# Altium PCB Solears_v1.PcbDoc
Units mm, origin at the board's own origin, x right, y up, seen from the top; angles counter-clockwise.
Board outline 58.04 x 66.42 mm, 2 copper layers (Top Layer, Bottom Layer); 119 components, 96 nets, 392 pads, 59 vias.
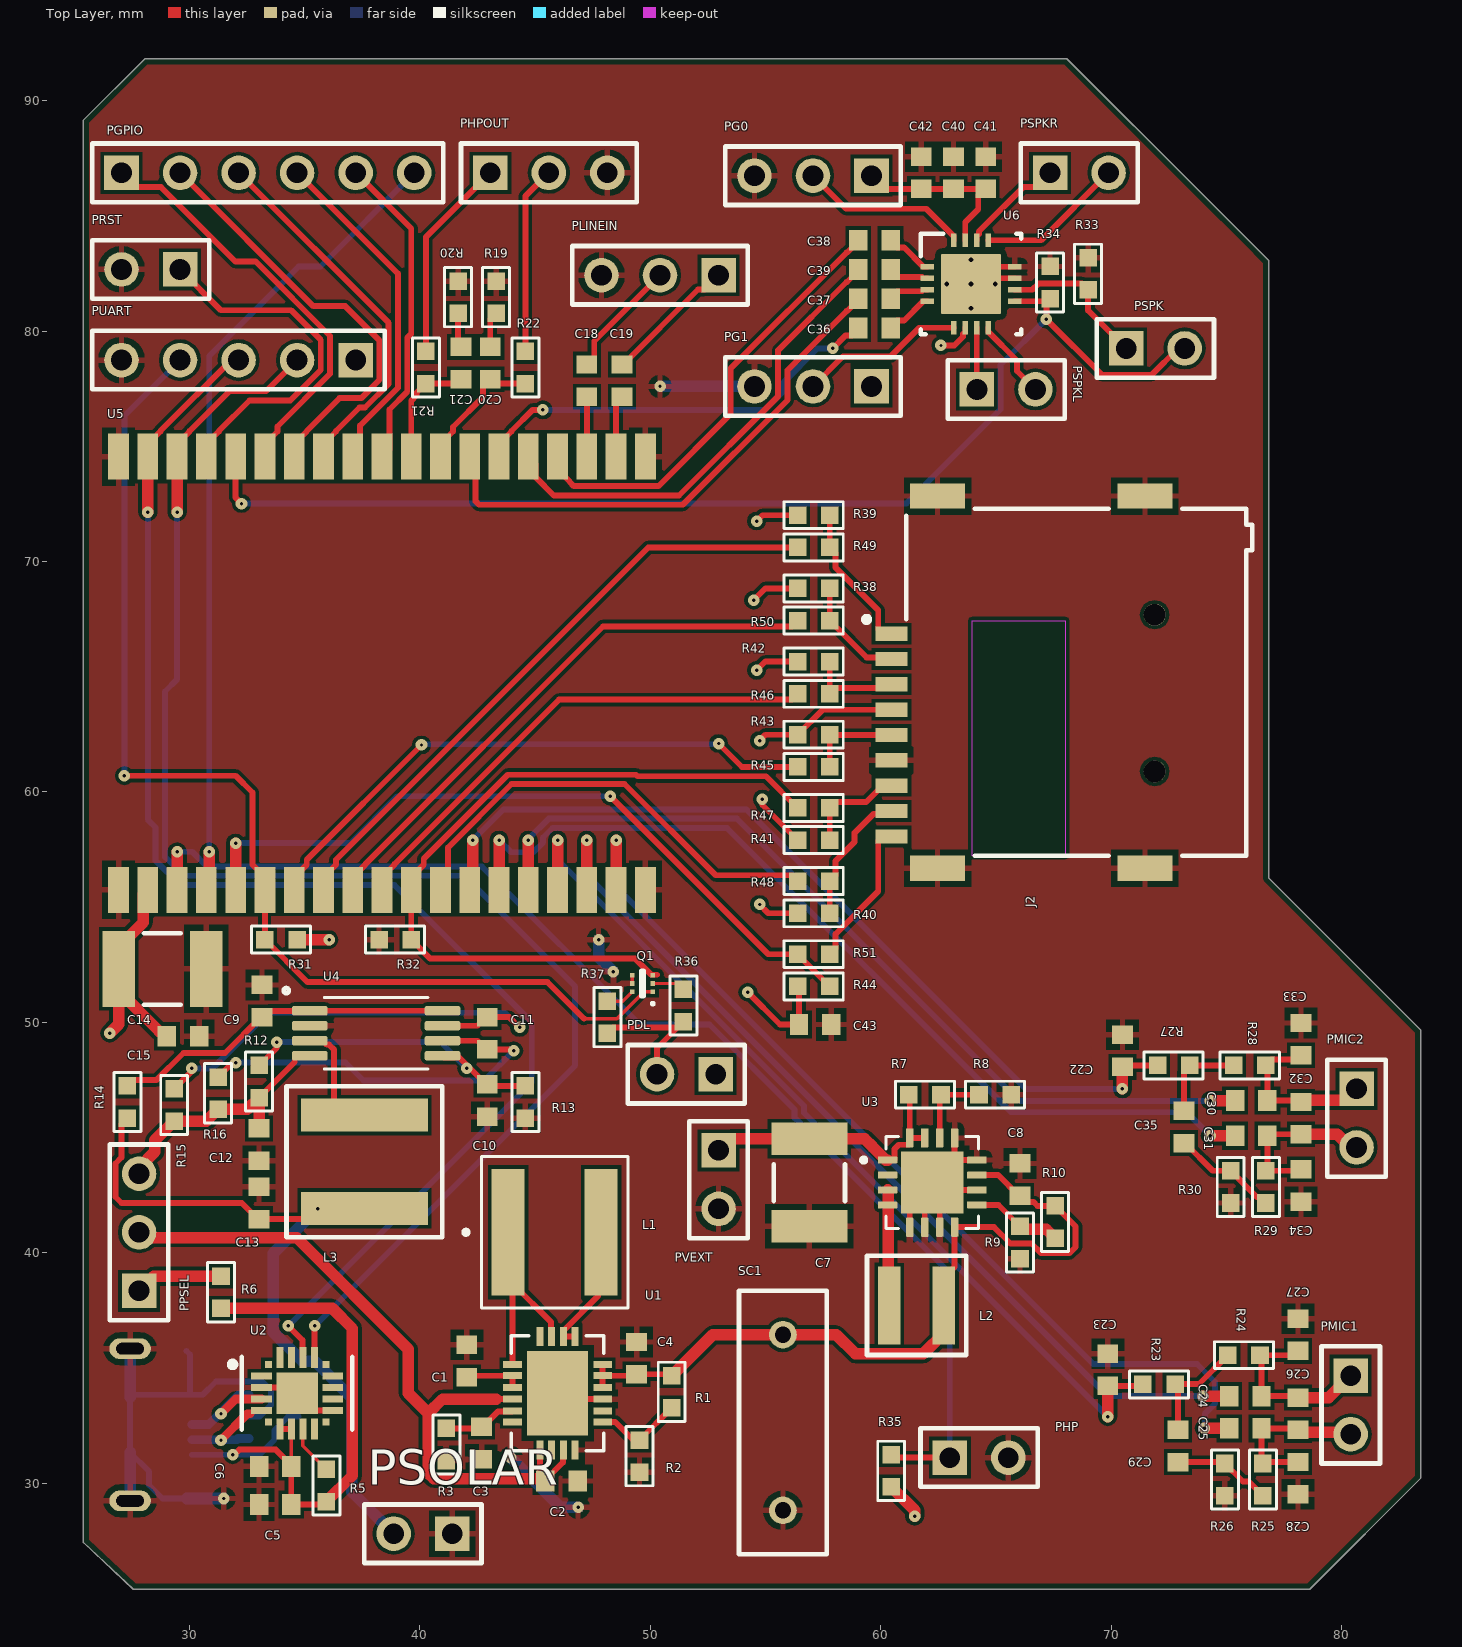
[diagram p0: Top Layer view]
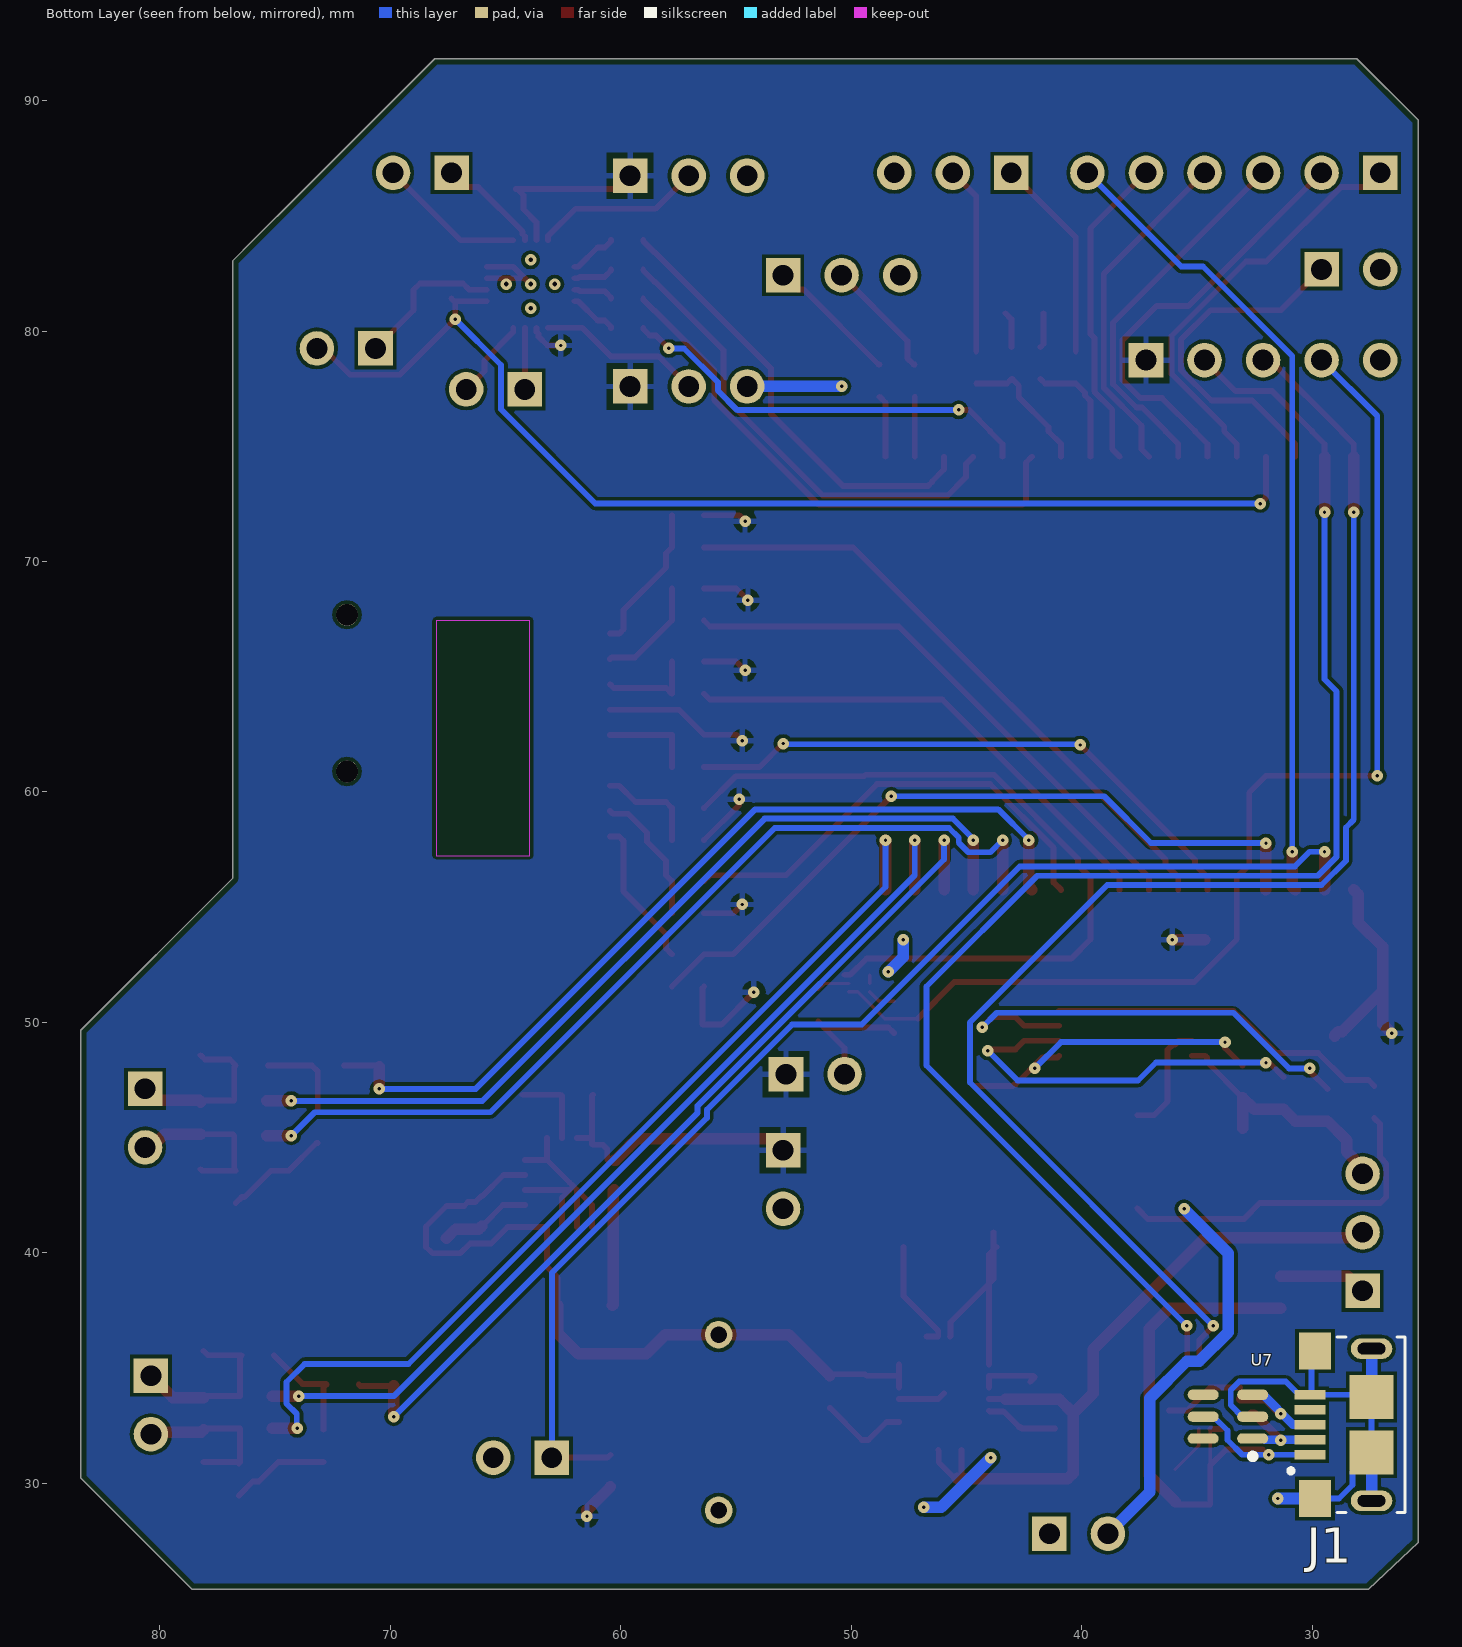
[diagram p1: Bottom Layer view, seen from below]

## Layer stack, top to bottom
Top Solder: solder mask 0.0102, Solder Resist, Dk 3.5
Top Layer: signal copper 0.0356
Dielectric 1: dielectric 0.32, FR-4, Dk 4.8
Bottom Layer: signal copper 0.0356
Bottom Solder: solder mask 0.0102, Solder Resist, Dk 3.5

## Board outline
25.4,27.432 27.559,25.4 78.613,25.4 83.439,30.226 83.439,49.657 76.835,56.261 76.835,83.058 75.946,83.947 73.914,85.979 68.072,91.821 28.067,91.821 25.4,89.154

## Design rules (kind name [scope] priority, off if disabled: settings)
BoardOutlineClearance [All] p1: gap=0.254 ignorepadtopadclearanceinfootprint=FALSE except(0: Arc-SplitContinuation Track-SplitContinuation SMDPad-SplitContinuation THPad-SplitContinuation Via-SplitContinuation Fill-SplitContinuation Poly-SplitContinuation Region-SplitContinuation Text-SplitContinuation)
Clearance [All] p1: gap=0.15 ignorepadtopadclearanceinfootprint=FALSE except(0: Arc-Hole Track-Hole SMDPad-Hole THPad-Hole Via-Hole Fill-Hole Poly-Hole Region-Hole Text-Hole)
DiffPairsRouting [All] p1: maxlimit=0.254 minlimit=0.254 mostfreqgap=0.254 toplayer_minwidth=0.381 toplayer_maxwidth=0.381 toplayer_prefwidth=0.381 bottomlayer_minwidth=0.381 bottomlayer_maxwidth=0.381 bottomlayer_prefwidth=0.381 maxuncoupledlength=12.7
MinimumSolderMaskSliver [All] p1: minsoldermaskwidth=0.1
PolygonConnect [All] p1: connectstyle=Relief reliefconductorwidth=0.254 reliefentries=4 polygonreliefangle="90 Angle" airgapwidth=0.254
RoutingVias [All] p1: holewidth=0.711 width=1.27 viastyle="Through Hole" minholewidth=0.711 minwidth=1.27 maxholewidth=0.711 maxwidth=1.27
SilkToSilkClearance [All] p1: silktosilkclearance=0.1
SilkToSolderMaskClearance [IsPad] p1: minsilkscreentomaskgap=0.1 clearancetoexposedcopper=TRUE
SolderMaskExpansion [All] p1: expansion=0.102
Width [All] p1: maxlimit=0.5 minlimit=0.15 preferedwidth=0.254 minimp=50.000000 maximp=50.000000 favimp=50.000000
26 further rules are at their usual default settings.

## Classes and differential pairs
component class Consumer: C14 C15 C18 C19 C20 C21 C22 C23 C24 C25 C26 C27 C28 C29 C30 C31 C32 C33 C34 C35 C36 C37 C38 C39 C40 C41 C42 C43 J2 PDL PG0 PG1 PGPIO PHP PHPOUT PLINEIN PMIC1 PMIC2 PRST PSPK PSPKL PSPKR PUART Q1 R19 R20 R21 R22 R23 R24 R25 R26 R27 R28 R29 R30 R31 R32 R33 R34 R35 R36 R37 R38 R39 R40 R41 R42 R43 R44 R45 R46 R47 R48 R49 R50 R51 U5 U6
component class Harvester: C1 C2 C3 C4 C5 C6 C7 C8 C9 C10 C11 C12 C13 J1 L1 L2 L3 PPSEL PSOLAR PVEXT R1 R2 R3 R5 R6 R7 R8 R9 R10 R12 R13 R14 R15 R16 SC1 U1 U2 U3 U4 U7
differential pair USB: +USB_P -USB_N

## Components (designator, comment, footprint, x,y, rotation, side; value= is the part's Value field where it differs from the comment)
C1 "Cap" 1608[0603] 42.037,35.306 r270 top value=10uF
C2 "Cap" 1608[0603] 46.147,30.099 r180 top value=10uF
C3 "Cap" 1608[0603] 42.672,31.75 r90 top value=430pF
C4 "Cap" 1608[0603] 49.403,35.433 r270 top value=10uF
C5 "Cap" 1608[0603] 33.72,29.083 r0 top value=10uF
C6 "Cap" 1608[0603] 33.72,30.734 r0 top value=10uF
C7 "Cap" 1812 56.896,43.053 r90 top value=47uF
C8 "Cap" 1608[0603] 66.04,43.18 r270 top value=10uF
C9 "Cap" 1608[0603] 33.147,50.927 r90 top value=10uF
C10 "Cap" 1608[0603] 42.926,46.609 r90 top value=1nF
C11 "Cap" 1608[0603] 42.926,49.53 r90 top value=1uF
C12 "Cap" 1608[0603] 33.02,44.704 r90 top value=10uF
C13 "Cap" 1608[0603] 33.02,42.164 r90 top value=10uF
C14 "Cap" 1812 28.829,52.324 r180 top value=10uF
C15 "Cap" 1608[0603] 29.718,49.403 r180 top value=10uF
C18 "Cap" 1608[0603] 47.244,77.851 r270 top value=10uF
C19 "Cap" 1608[0603] 48.768,77.851 r270 top value=10uF
C20 "Cap" 1608[0603] 43.053,78.613 r270 top value=10uF
C21 "Cap" 1608[0603] 41.783,78.613 r270 top value=10uF
C22 "Cap" 1608[0603] 70.485,48.768 r270 top value=10uF
C23 "Cap" 1608[0603] 69.85,34.925 r270 top value=10uF
C24 "Cap" 1608[0603] 75.819,33.782 r0 top value=10uF
C25 "Cap" 1608[0603] 75.819,32.385 r0 top value=10uF
C26 "Cap" 1608[0603] 78.105,33.02 r270 top value=10uF
C27 "Cap" 1608[0603] 78.105,36.449 r270 top value=10uF
C28 "Cap" 1608[0603] 78.105,30.226 r270 top value=10uF
C29 "Cap" 1608[0603] 72.898,31.623 r270 top value=10uF
C30 "Cap" 1608[0603] 76.073,46.609 r0 top value=10uF
C31 "Cap" 1608[0603] 76.073,45.085 r0 top value=10uF
C32 "Cap" 1608[0603] 78.232,45.847 r270 top value=10uF
C33 "Cap" 1608[0603] 78.232,49.276 r270 top value=10uF
C34 "Cap" 1608[0603] 78.232,42.926 r270 top value=10uF
C35 "Cap" 1608[0603] 73.152,45.466 r270 top value=10uF
C36 "Cap" 1608[0603] 59.724,80.137 r180 top value=1uF
C37 "Cap" 1608[0603] 59.724,81.407 r180 top value=1uF
C38 "Cap" 1608[0603] 59.724,83.947 r180 top value=1uF
C39 "Cap" 1608[0603] 59.724,82.677 r180 top value=1uF
C40 "Cap" 1608[0603] 63.153,86.868 r270 top value=1uF
C41 "Cap" 1608[0603] 64.55,86.868 r270 top value=1uF
C42 "Cap" 1608[0603] 61.756,86.868 r270 top value=10uF
C43 "Cap" 1608[0603] 57.15,49.911 r0 top value=10uF
J1 "10118193-0001LF" FCI_10118193-0001LF 27.424,32.542 r90 bottom
J2 "MEM2075-00-140-01-A" GCT_MEM2075-00-140-01-A 71.882,64.291 r90 top
L1 "XAL6030-332MEC" IND_XAL6030-332MEC 45.847,40.894 r0 top
L2 "XAL4030-682MEC" FP-XAL4030-472MEC-MFG 61.553,37.719 r180 top
L3 "XAL6060-103MEC" FP-XAL6060-103MEC-MFG 37.592,43.954 r90 top
PDL "Header 2" HDR1X2 52.832,47.752 r180 top
PG0 "Header 3" HDR1X3 59.597,86.741 r180 top
PG1 "Header 3" HDR1X3 59.597,77.597 r180 top
PGPIO "Header 6" HDR1X6 27.051,86.868 r0 top
PHP "Header 2" HDR1X2 62.992,31.115 r0 top
PHPOUT "Header 3" HDR1X3 43.053,86.868 r0 top
PLINEIN "Header 3" HDR1X3 52.959,82.423 r180 top
PMIC1 "Header 2" HDR1X2 80.391,34.671 r270 top
PMIC2 "Header 2" HDR1X2 80.645,47.117 r270 top
PPSEL "Header 3" HDR1X3 27.813,38.354 r90 top
PRST "Header 2" HDR1X2 29.591,82.677 r180 top
PSOLAR "Header 2" HDR1X2 41.402,27.813 r180 top (schematic designator PVEXT?)
PSPK "Header 2" HDR1X2 70.646,79.248 r0 top
PSPKL "Header 2" HDR1X2 64.169,77.47 r0 top
PSPKR "Header 2" HDR1X2 67.344,86.868 r0 top
PUART "Header 5" HDR1X5 37.211,78.74 r180 top
PVEXT "Header 2" HDR1X2 52.959,44.45 r270 top
Q1 "NST847BDP6T5G" ONSC-SOT-963-6-527AD-01_B_V 49.657,51.689 r180 top
R1 "Res1" 0603R-GENERIC 50.927,33.274 r90 top value=1.2M
R2 "Res1" 0603R-GENERIC 49.53,31.877 r270 top value=301k
R3 "Res1" 0603R-GENERIC 41.148,30.988 r90 top value=3.7K
R5 "Res1" 0603R-GENERIC 35.941,30.607 r270 top value=1K
R6 "Res1" 0603R-GENERIC 31.369,38.989 r270 top value=1K
R7 "Res1" 0603R-GENERIC 62.611,46.863 r180 top value=1.12M
R8 "Res1" 0603R-GENERIC 65.659,46.863 r180 top value=200K
R9 "Res1" 0603R-GENERIC 66.04,41.148 r270 top value=500K
R10 "Res1" 0603R-GENERIC 67.564,40.64 r90 top value=1.3M
R12 "Res1" 0603R-GENERIC 33.02,48.133 r270 top value=1M
R13 "Res1" 0603R-GENERIC 44.577,45.847 r90 top value=550K
R14 "Res1" 0603R-GENERIC 27.305,45.847 r90 top value=1K
R15 "Res1" 0603R-GENERIC 29.337,45.72 r90 top value=1K
R16 "Res1" 0603R-GENERIC 31.242,46.228 r90 top value=1K
R19 "Res1" 0603R-GENERIC 43.307,80.772 r90 top value=1K
R20 "Res1" 0603R-GENERIC 41.656,82.169 r270 top value=1K
R21 "Res1" 0603R-GENERIC 40.259,79.121 r270 top value=1K
R22 "Res1" 0603R-GENERIC 44.577,79.121 r270 top value=1K
R23 "Res1" 0603R-GENERIC 71.374,34.29 r0 top value=1K
R24 "Res1" 0603R-GENERIC 75.057,35.56 r0 top value=1K
R25 "Res1" 0603R-GENERIC 76.581,30.861 r270 top value=1K
R26 "Res1" 0603R-GENERIC 74.93,30.861 r270 top value=1K
R27 "Res1" 0603R-GENERIC 72.009,48.133 r0 top value=1K
R28 "Res1" 0603R-GENERIC 75.311,48.133 r0 top value=1K
R29 "Res1" 0603R-GENERIC 76.708,43.561 r270 top value=1K
R30 "Res1" 0603R-GENERIC 75.184,43.561 r270 top value=1K
R31 "Res1" 0603R-GENERIC 34.671,53.594 r180 top value=1K
R32 "Res1" 0603R-GENERIC 39.624,53.594 r180 top value=1K
R33 "Res1" 0603R-GENERIC 68.995,81.788 r90 top value=250K
R34 "Res1" 0603R-GENERIC 67.344,81.407 r90 top value=250K
R35 "Res1" 0603R-GENERIC 60.452,29.845 r90 top value=1K
R36 "Res1" 0603R-GENERIC 51.435,51.435 r270 top value=1K
R37 "Res1" 0603R-GENERIC 48.133,50.927 r270 top value=1K
R38 "Res1" 0603R-GENERIC 56.388,68.834 r0 top value=250K
R39 "Res1" 0603R-GENERIC 56.388,72.009 r0 top value=250K
R40 "Res1" 0603R-GENERIC 56.388,54.737 r0 top value=250K
R41 "Res1" 0603R-GENERIC 56.388,57.912 r0 top value=250K
R42 "Res1" 0603R-GENERIC 56.388,65.659 r0 top value=250K
R43 "Res1" 0603R-GENERIC 56.388,62.484 r0 top value=250K
R44 "Res1" 0603R-GENERIC 56.388,51.562 r0 top value=250K
R45 "Res1" 0603R-GENERIC 56.388,61.087 r0 top value=250K
R46 "Res1" 0603R-GENERIC 56.388,64.262 r0 top value=250K
R47 "Res1" 0603R-GENERIC 56.388,59.309 r0 top value=250K
R48 "Res1" 0603R-GENERIC 56.388,56.134 r0 top value=250K
R49 "Res1" 0603R-GENERIC 56.388,70.612 r0 top value=250K
R50 "Res1" 0603R-GENERIC 56.388,67.437 r0 top value=250K
R51 "Res1" 0603R-GENERIC 57.785,52.959 r180 top value=250K
SC1 "Cap" RAD-0.3 55.753,32.639 r90 top value=35F
U1 "LTC3128" QFN50P400X500X80-21N 45.974,33.909 r0 top
U2 "CP2102N-A02-GQFN20R" FP-CP2102N-A02-GQFN20R-MFG 34.671,33.909 r0 top
U3 "TPS61030RSARG4" QFN65P400X400X100-17N 62.23,43.053 r0 top
U4 "SPV1040T" SOP65P640X120-8N 38.1,49.53 r0 top
U5 "ESP32 A1S" "ESP32 A1S" 49.784,58.674 r90 top
U6 "LM4674SQ/NOPB" RGH0016A_V 63.915,82.042 r0 top
U7 "IP4220CZ6,125" NXP-SOT457_L 33.655,32.893 r0 bottom

## Footprints (in the part's own frame and the unit in brackets; to place one, negate y for a bottom-side part, rotate by r counter-clockwise, add the part's x,y. Pads: shape width x height; smd on the part's side, far side on the other; paste and mask are expansions set on the pad)
0603R-GENERIC [mil] "RESISTOR 0603"
  rect 30x30 smd: 1(0,0) 2(55,0)
  silkscreen extent -23,-23 78,23, body extent -4,-15 59,15, height 19
1608[0603] [mm] "Chip Capacitor, Body 1.6x0.8mm, IPC High Density"
  rect 0.8x0.9 smd: 1(-0.7,0) 2(0.7,0)
  body extent -0.87,-0.48 0.87,0.48, height 1.3
1812 [mm] "Chip Capacitor, Body 4.5x3.2mm, IPC High Density"
  rect 1.4x3.3 smd: 1(-1.9,0) 2(1.9,0)
  silkscreen extent -0.8,-1.55 0.8,1.55, body extent -2.4,-1.7 2.4,1.7, height 1.4
"ESP32 A1S" [mm]
  rect 2x0.9 smd: 1(-2.921,22.86) 2(-2.921,21.59) 3(-2.921,20.32) 4(-2.921,19.05) 5(-2.921,17.78) 6(-2.921,16.51) 7(-2.921,15.24) 8(-2.921,13.97) 9(-2.921,12.7) 10(-2.921,11.43) 11(-2.921,10.16) 12(-2.921,8.89) 13(-2.921,7.62) 14(-2.921,6.35) 15(-2.921,5.08) 16(-2.921,3.81) 17(-2.921,2.54) 18(-2.921,1.27) 19(-2.921,0) 20(15.875,0) 21(15.875,1.27) 22(15.875,2.54) 23(15.875,3.81) 24(15.875,5.08) 25(15.875,6.35) 26(15.875,7.62) 27(15.875,8.89) 28(15.875,10.16) 29(15.875,11.43) 30(15.875,12.7) 31(15.875,13.97) 32(15.875,15.24) 33(15.875,16.51) 34(15.875,17.78) 35(15.875,19.05) 36(15.875,20.32) 37(15.875,21.59) 38(15.875,22.86)
FCI_10118193-0001LF [mm]
  rect 0.4x1.35 smd: 1(-1.3,2.675) 2(-0.65,2.675) 3(0,2.675) 4(0.65,2.675) 5(1.3,2.675)
  rect 1.6x1.4 smd: S1(-3.2,2.45) S2(3.2,2.45)
  rect 1.9x1.9 smd: S3(1.2,0) S4(-1.2,0)
  oval 0.9x1.8 hole 0.5 slot 1.2 at 90 deg: S5(-3.3,0) S6(3.3,0)
  round 0.5 hole 0.5 unplated: ""(-3.3,0) ""(3.3,0)
  silkscreen extent -3.8,-1.45 3.8,3.6
FP-CP2102N-A02-GQFN20R-MFG [mm]
  rect 0.3x0.3 smd paste+0 mask+0: 1(-1.25,1.25) 6(-1.25,-1.25) 11(1.25,-1.25) 16(1.25,1.25)
  rect 0.9x0.3 smd paste+0 mask+0: 2(-1.55,0.75) 3(-1.55,0.25) 4(-1.55,-0.25) 5(-1.55,-0.75) 12(1.55,-0.75) 13(1.55,-0.25) 14(1.55,0.25) 15(1.55,0.75)
  rect 0.3x0.9 smd paste+0 mask+0: 7(-0.75,-1.55) 8(-0.25,-1.55) 9(0.25,-1.55) 10(0.75,-1.55) 17(0.75,1.55) 18(0.25,1.55) 19(-0.25,1.55) 20(-0.75,1.55)
  rect 1.8x1.8 smd paste-1000 mask+0: 21(0,0)
  silkscreen extent -2.92,-1.58 2.4,1.58, body extent -2.1,-2.1 2.1,2.1, height 0.25
FP-XAL4030-472MEC-MFG [mm]
  rect 0.98x3.4 smd paste+0 mask+0: 1(-1.185,0) 2(1.185,0)
  silkscreen extent -2.15,-2.15 2.15,2.15, body extent -2.25,-2.25 2.25,2.25, height 0.25
FP-XAL6060-103MEC-MFG [mm]
  rect 1.43x5.5 smd paste+0 mask+0: 1(-2.02,0) 2(2.02,0)
  silkscreen extent -3.28,-3.38 3.28,3.38, body extent -3.38,-3.48 3.38,3.48, height 0.25
GCT_MEM2075-00-140-01-A [mm]
  rect 0.62x1.4 smd: P1(2.58,11.42) P2(1.48,11.42) P3(0.38,11.42) P4(-0.72,11.42) P5(-1.82,11.42) P6(-2.92,11.42) P7(-4.02,11.42) P8(-5.12,11.42) P9(-6.22,11.42)
  rect 1.1x2.4 smd: SH1(-7.6,0.42) SH2(-7.6,9.42) SH3(8.55,9.42) SH4(8.55,0.42)
  round 0.95 hole 0.95 unplated: ""(-3.4,0) ""(3.4,0)
  Keep-Out Layer region: 3.15,3.87 -7.05,3.87 -7.05,7.92 3.15,7.92
  Keep-Out Layer region: 3.15,3.87 -7.05,3.87 -7.05,7.92 3.15,7.92
  silkscreen extent -7.05,-4.23 8,12.62
HDR1X2 [mm] "Connector; Header; 2 Position"
  rect 1.5x1.5 hole 0.9: 1(0,0)
  round 1.5 hole 0.9: 2(2.54,0)
  silkscreen extent -1.27,-1.27 3.81,1.27
HDR1X3 [mm] "Connector; Header; 3 Position"
  rect 1.5x1.5 hole 0.9: 1(0,0)
  round 1.5 hole 0.9: 2(2.54,0) 3(5.08,0)
  silkscreen extent -1.27,-1.27 6.35,1.27
HDR1X5 [mm] "Connector; Header; 5 Position"
  rect 1.5x1.5 hole 0.9: 1(0,0)
  round 1.5 hole 0.9: 2(2.54,0) 3(5.08,0) 4(7.62,0) 5(10.16,0)
  silkscreen extent -1.27,-1.27 11.43,1.27
HDR1X6 [mm] "Connector; Header; 6 Position"
  rect 1.5x1.5 hole 0.9: 1(0,0)
  round 1.5 hole 0.9: 2(2.54,0) 3(5.08,0) 4(7.62,0) 5(10.16,0) 6(12.7,0)
  silkscreen extent -1.27,-1.27 13.97,1.27
IND_XAL6030-332MEC [mm]
  rect 1.43x5.5 smd: 1(-2.02,0) 2(2.02,0)
  silkscreen extent -3.95,-3.28 3.18,3.28
NXP-SOT457_L [mm] "SOP, 6-Leads, Body 3.1x1.7mm, Pitch 0.95mm, IPC High Density"
  oval 1.35x0.45 smd: 1(-1.075,0.95) 2(-1.075,0) 3(-1.075,-0.95) 4(1.075,-0.95) 5(1.075,0) 6(1.075,0.95)
  silkscreen extent -1.2,1.6 -0.95,1.85, body extent -0.85,-1.55 0.85,1.55, height 1.1
ONSC-SOT-963-6-527AD-01_B_V [mm] "SOT23, 6-Leads, Body 1.05x0.85mm, Pitch 0.35mm"
  rect 0.2x0.2 smd: 1(-0.45,0.35) 2(-0.45,0) 3(-0.45,-0.35) 4(0.45,-0.35) 5(0.45,0) 6(0.45,0.35)
  silkscreen extent -0.51,-0.55 0.05,0.94, body extent -0.42,-0.53 0.43,0.53, height 0.4
QFN50P400X500X80-21N [mil]
  rect 32x12 smd: 1(-77,49) 2(-77,30) 3(-77,10) 4(-77,-10) 5(-77,-30) 6(-77,-49) 11(77,-49) 12(77,-30) 13(77,-10) 14(77,10) 15(77,30) 16(77,49)
  rect 12x32 smd: 7(-30,-97) 8(-10,-97) 9(10,-97) 10(30,-97) 17(30,97) 18(10,97) 19(-10,97) 20(-30,97)
  rect 104x144 smd: 21(0,0)
  silkscreen extent -79,-98 79,98
QFN65P400X400X100-17N [mm]
  rrect25% 0.84x0.32 smd: 1(-1.935,0.975) 2(-1.935,0.325) 3(-1.935,-0.325) 4(-1.935,-0.975) 9(1.935,-0.975) 10(1.935,-0.325) 11(1.935,0.325) 12(1.935,0.975)
  rrect25% 0.32x0.84 smd: 5(-0.975,-1.935) 6(-0.325,-1.935) 7(0.325,-1.935) 8(0.975,-1.935) 13(0.975,1.935) 14(0.325,1.935) 15(-0.325,1.935) 16(-0.975,1.935)
  rect 2.7x2.7 smd paste-2: 17(0,0)
  silkscreen extent -3.07,-2 2,2, body extent -2,-2 2,2, height 1
RAD-0.3 [mm] "Radial Cap, Thru-Hole; 2 Leads; 0.3 in Pin Spacing"
  round 1.2 hole 0.7: 1(-3.81,0) 2(3.81,0)
  silkscreen extent -5.71,-1.91 5.71,1.91
RGH0016A_V [mm] "QFN, 16-Leads, Body 4x4mm, Pitch 0.5mm, TI Recommended"
  rrect40% 0.6x0.25 smd: 1(-1.9,0.75) 2(-1.9,0.25) 3(-1.9,-0.25) 4(-1.9,-0.75) 9(1.9,-0.75) 10(1.9,-0.25) 11(1.9,0.25) 12(1.9,0.75)
  rrect40% 0.25x0.6 smd: 5(-0.75,-1.9) 6(-0.25,-1.9) 7(0.25,-1.9) 8(0.75,-1.9) 13(0.75,1.9) 14(0.25,1.9) 15(-0.25,1.9) 16(-0.75,1.9)
  rrect4% 2.6x2.6 smd paste-1.3: 17(0,0)
  silkscreen extent -2.17,-2.17 2.17,2.17, body extent -2.05,-2.05 2.05,2.05, height 0.81
SOP65P640X120-8N [mm]
  rrect50% 1.56x0.41 smd: 1(-2.88,0.975) 2(-2.88,0.325) 3(-2.88,-0.325) 4(-2.88,-0.975) 5(2.88,-0.975) 6(2.88,-0.325) 7(2.88,0.325) 8(2.88,0.975)
  silkscreen extent -4.01,-1.55 2.25,1.96

## Part data
C1 C2 C3 C4 C5 C6 C7 C8 C9 C10 C11 C12 C13 C14 C15 C18 C19 C20 C21 C22 C23 C24 C25 C26 C27 C28 C29 C30 C31 C32 C33 C34 C35 C36 C37 C38 C39 C40 C41 C42 C43 SC1: "Capacitor", LatestRevisionDate=17-Jul-2002, LatestRevisionNote="Re-released for DXP Platform.", PackageDescription="Radial Cap, Thru-Hole; 2 Leads; 0.3 in Pin Spacing", PackageReference=RAD-0.3, Published=8-Jun-2000, Publisher="Altium Limited"
J1: "USB - micro B USB 2.0 Receptacle Connector 5 Position Surface Mount, Right Angle; Through Hole", Package=None, Availability=Unavailable, MF="Amphenol ICC", MP=10118193-0001LF, Price=None, SnapEDA_Link=https://www.snapeda.com/parts/10118193-0001LF/Amphenol%20FCI/view-part/2758989/?ref=snap
J2: "9 _8 + 1_ Position Card Connector microSD™ Surface Mount, Right Angle Gold", Package="Package Analog Devices", Availability=Unavailable, MF="Global Connector Technology", MP=MEM2075-00-140-01-A, Price=None, SnapEDA_Link=https://www.snapeda.com/parts/MEM2075-00-140-01-A/Global%20Connector%20Technology/view-part/2680480/?ref=snap
L1: "Power inductor, shielded, 20% tol, SMT, RoHS, halogen f", Package=None, Availability=Unavailable, MP=XAL6030-332MEC, Price=None
L2: library part CMP-11268-000082-1, "Power Inductor (SMD), 6.8 µH, 5.1 A, Shielded, 4.5 A, XAL40xx Series, 4mm x 4mm x 3.1mm", Case/Package=SMD/SMT, DC Resistance (DCR)=44.1mR, Inductance=4.7uH, Inductance Tolerance=20%, Max DC Current=5.1A, Max Operating Temperature=125°C, Min Operating Temperature=-40°C, Package Quantity=500, Saturation Current=4.5A, Self Resonant Frequency=36MHz, Test Frequency=100kHz, Core Material=Composite, Height=3.1mm, Lead Free="Contains Lead", Length=4.3mm, Mount="Surface Mount", Packaging="Tape and Reel", REACH SVHC="No SVHC", RMS Current (Irms)=5.1A, RoHS Compliant=Yes, Series=XAL4030, Shielding=Shielded, Termination=SMD/SMT, Tolerance=20%, Width=4.3mm
L3: library part CMP-11268-000089-1, "- - Výkonový Induktor (SMD), 10 µH, 7 A, Stínený, 7.6 A, Série XAL6060, 6,56mm x 6,36mm x 6,1mm", Case/Package=SMD/SMT, DC Resistance (DCR)=29.82mR, Inductance=10uH, Inductance Tolerance=20%, Max DC Current=7A, Max Operating Temperature=125°C, Min Operating Temperature=-40°C, Package Quantity=250, Saturation Current=7.6A, Self Resonant Frequency=14MHz, Test Frequency=100kHz, Core Material=Composite, Height=6.1mm, Lead Free="Contains Lead", Length=6.76mm, Mount="Surface Mount", Packaging="Tape and Reel", REACH SVHC="No SVHC", RMS Current (Irms)=7A, RoHS Compliant=Yes, Series=XAL6060, Shielding=Shielded, Termination=SMD/SMT, Tolerance=20%, Width=6.56mm
PDL PHP PMIC1 PMIC2 PRST PSOLAR PSPK PSPKL PSPKR PVEXT: "Header, 2-Pin", LatestRevisionDate=17-Jul-2002, LatestRevisionNote="Re-released for DXP Platform.", Publisher="Altium Limited"
PG0 PG1 PHPOUT PLINEIN PPSEL: "Header, 3-Pin", LatestRevisionDate=17-Jul-2002, LatestRevisionNote="Re-released for DXP Platform.", Publisher="Altium Limited"
PGPIO: "Header, 6-Pin", LatestRevisionDate=17-Jul-2002, LatestRevisionNote="Re-released for DXP Platform.", Publisher="Altium Limited"
PUART: "Header, 5-Pin", LatestRevisionDate=17-Jul-2002, LatestRevisionNote="Re-released for DXP Platform.", Publisher="Altium Limited"
Q1: library part CMP-1048-01004-1, "Dual General Purpose Transistors, 6-Pin SOT-963, Pb-Free, Tape and Reel", Manufacturer="On Semiconductor", ComponentLink1Description="Manufacturer URL", ComponentLink1URL=http://www.onsemi.com/, ComponentLink2Description=Datasheet, ComponentLink2URL=http://www.onsemi.com/pub_link/Collateral/NST847BDP6-D.PDF, ComponentLink3Description="Package Specification", ComponentLink3URL=http://www.onsemi.com/pub_link/Collateral/NST847BDP6-D.PDF, DatasheetVersion="Rev. 0", fT Min (MHz)=100, IC Continuous (A)=0.1, Mounting Technology="Surface Mount", PackageDescription="6-Pin SOT23, Body 1 x 0.8 mm, Pitch 0.35 mm", PackageReference=SOT-963-6-527AD-01_B, PackageVersion="Rev. B, 04/2008", Packing="Tape and Reel", PartNumber=NST847BDP6T5G, Polarity="Dual NPN", RoHS=TRUE
R1 R2 R3 R5 R6 R7 R8 R9 R10 R12 R13 R14 R15 R16 R19 R20 R21 R22 R23 R24 R25 R26 R27 R28 R29 R30 R31 R32 R33 R34 R35 R36 R37 R38 R39 R40 R41 R42 R43 R44 R45 R46 R47 R48 R49 R50 R51: "Resistor", LatestRevisionDate=17-Jul-2002, LatestRevisionNote="Re-released for DXP Platform.", PackageDescription="Axial Device, Thru-Hole; 2 Leads; 0.3 in Pin Spacing", PackageReference=AXIAL-0.3, Published=8-Jun-2000, Publisher="Altium Limited"
U2: library part CMP-08107-000007-1, "IC USB TO UART BRIDGE QFN20"
U4: "IC BATTERY CHARGER SOLAR 8TSSOP", Package="TSSOP-8 STMicroelectronics", Availability=Unavailable, MF=STMicroelectronics, MP=SPV1040T, Price=None, SnapEDA_Link=https://www.snapeda.com/parts/SPV1040T/STMicroelectronics/view-part/480076/?ref=snap
U5: Package=None, Availability=Unavailable, MP=SAMTEC-FTS-110-01-X-S, Price=None
U6: library part CMP-0057-00288-4, "Filterless 2.5 Stereo Class D Audio Power Amplifier, 16-pin LLP, Pb-Free", Manufacturer="Texas Instruments", PackageTopMarking=NS*UZXYTT*L4674SQ, PowerWise=Y, ComponentLink1Description="Datasheet URL", ComponentLink1URL=http://www.ti.com/general/docs/lit/getliterature.tsp?genericPartNumber=LM4674&fileType=pdf, CompType="Audio IC", High-Reliability=Y, PackageDescription="LLP, Plastic, Quad, 4 x 4 x 0.8mm Body, 16 Lead, 0.5mm Pitch, No Pullback", PackageReference=RGH0016A, PartNumber=LM4674SQ/NOPB, PinCount=16, RoHS=Y
U7: library part CMP-2000-06457-1, "Dual USB 2.0 integrated ESD protection, 0 to 5.5 V, -40 to 85 degC, 6-Pin TSOP (SOT457), RoHS, Tape and Reel", Capacitance Value=1.2pF, ESD Protection Voltage=8KV@ContactDisc, Leakage Current=0.1uA, Manufacturer="NXP Semiconductors", Operating Temperature Max Deg. C=85C, Operating Temperature Min Deg. C=-40C, Package / Case=TSOP, Package Description="6-Pin Thin Small Outline Package, Body 2.9 x 1.5 mm, Pitch 0.95 mm", Package Reference=SOT457, Package Version="06-03-16, 03/2006", PartNumber=IP4220CZ6, Working Voltage=5.5V, Configuration=Quad, Datasheet URL=http://cache.nxp.com/documents/data_sheet/IP4220CZ6.pdf, Datasheet Version="Rev. 5, 07/2011", Direction Type=Uni-Directional, Leakage Current (Max)=0.1uA, Manufacturer URL=http://www.nxp.com/, Mounting Style=SurfaceMount, Mounting Technology=SurfaceMount, Number of Channels=4, Package URL=http://www.nxp.com/documents/outline_drawing/sot457_po.pdf, Packaging=TapeandReel, Pin Count=6, Product Depth (mm)=1.7mm, Product Height (mm)=1mm, Product Length (mm)=3.1mm, Rad Hardened=No, Suppressor Type=DiodeArrays, VF=0.7V, VIN Max=5.5V, VIN Min=0V, Working Voltage (Max)=5.5V

## Via types
v1: diameter 0.5, hole 0.15, Top Layer to Bottom Layer, 54 vias
v2: diameter 0.5, hole 0.2, Top Layer to Bottom Layer, 5 vias

## Nets (pads, with @x,y where several pads share a name; then routed paths per layer and width w, separated by ;. In a path a pad name is that pad's centre, name@x,y a point inside that pad or via, vN(x,y) a via of type N, cw(c..) or ccw(c..) an arc to the next point about the centre after c; other vN are vias at no path point)
CTS: U2.15
DLMOD: PDL.2 R36.2 R37.2 | length 5.9
  Top Layer w0.254: R37.2 48.387,49.784 R36.2@51.181,49.784 ; PDL.2 50.292,48.895 R36.2@51.181,49.784 ; R36.2 R36.2@51.181,49.784
G0: PG0.2 U6.16 | length 7.4
  Top Layer w0.254: PG0.2 58.489,85.309 61.969,85.309 63.165,84.113 U6.16
G1: PG1.2 U6.5 | length 7.2
  Top Layer w0.254: PG1.2 58.362,78.902 60.431,78.902 61.671,80.142 U6.5
GND: C1.1 C2.1 C3.1 C4.1 C5.1 C6.1 C7.1 C8.1 C9.2 C10.1 C12.1 C13.2 C14.1 C15.1 C22.1 C23.1 C27.1 C28.2 C33.1 C34.2 C40.1 C41.1 C42.1 C43.2 J1. J1.5 J1.S1 J1.S2 J1.S3 J1.S4 J1.S5 J1.S6 J2.P6 J2.SH1 J2.SH2 J2.SH3 J2.SH4 PG0.3 PG1.3 PHP.2 PHPOUT.3 PLINEIN.3 PRST.2 PSOLAR.1 PUART.5 PVEXT.2 Q1.4 Q1.5 R2.2 R3.1 R8.1 R9.2 R13.1 R19.2 R20.1 R26.2 R30.2 R32.2 R33.2 R34.2 SC1.1 U1.10 U1.13 U1.21 U2.3 U2.12 U2.21 U3.5 U3.6 U3.7 U3.10 U3.12 U3.13 U3.17 U4.2 U5.1 U5.19 U5.20 U5.38 U6.11 U6.12 U6.17 U7.2 | length 52.7
  Top Layer w0.15: Q1.5 Q1.4
  Top Layer w0.254: U2.3 34.421,34.159 U2.21 35.421,33.159 U2.12 ; U1.21 46.228,33.655 U1.13 ; U3.5 61.255,42.078 U3.17@61.905,42.728 ; U3.6 U3.17@61.905,42.728 ; U3.7 62.555,42.403 U3.17@62.23,42.728 ; U3.13 U3.17@63.205,44.028 ; v2(63.915,82.042) U6.17@64.165,82.292 ; U3.10 U3.17@62.23,42.728 ; U3.12 U3.17@63.205,44.028 ; U6.11 U6.17@64.165,82.292 ; U6.12 64.665,82.792 U6.17@64.165,82.292 ; U3.17@61.905,42.728 U3.17@62.068,42.891 ; U3.17@62.068,42.891 U3.17@62.23,42.728 ; U3.17@62.068,42.891 U3.17 U3.17@63.205,44.028
  Bottom Layer w0.254: J1.S1 28.834,29.342 28.247,29.929 28.247,30.519 J1.S4 J1.S3 27.524,33.842 J1.5 ; J1.S2 30.026,35.59 30.026,33.915 J1.5 ; U7.2 33.03,32.893 33.532,33.395 33.532,34.051 33.166,34.417 31.149,34.417 30.574,33.842 J1.5
  Bottom Layer w0.5: J1.S5 J1.S4 ; J1.S3 J1.S6 ; J1.S1 v1(31.491,29.342) v1@31.496,29.337 ; v1(43.942,31.115) 46.101,28.956 v1(46.863,28.956) ; v1(47.752,53.594) 47.752,52.832 v1(48.387,52.197) ; v1(50.419,77.597) PG1.3
  other v2: 63.915,80.992 62.865,82.042 64.965,82.042 63.915,83.092
HBIAS: C22.2 R27.1 U5.13 | length 38.5
  Top Layer w0.254: C22.2 70.55,48.133 R27.1
  Top Layer w0.5: U5.13 42.291,55.88 v1(42.291,57.912) ; v1(70.485,47.117) C22.2
  Bottom Layer w0.254: v1(42.291,57.912) 43.626,59.247 54.164,59.247 66.294,47.117 v1(70.485,47.117)
HPDET: PHP.1 R35.2 U5.3 | length 53.6
  Top Layer w0.254: R35.2 60.579,31.115 PHP.1
  Top Layer w0.5: U5.3 v1(29.464,57.404)
  Bottom Layer w0.254: v1(29.464,57.404) 30.116,57.404 30.751,56.769 42.689,56.769 49.547,49.911 52.565,49.911 56.261,46.215 56.261,45.86 62.992,39.129 PHP.1
HPOUTL: PHPOUT.2 R22.1 | length 8.2
  Top Layer w0.254: R22.1 44.577,85.852 PHPOUT.2
HPOUTR: PHPOUT.1 R21.1 | length 8.9
  Top Layer w0.254: R21.1 40.259,84.074 PHPOUT.1
IO0: PUART.4 Q1.1 R31.2 U5.6 | length 50.2
  Top Layer w0.15: 47.117,50.165 48.551,50.165 49.725,51.339 Q1.1
  Top Layer w0.254: v1(27.178,60.706) 32.004,60.706 32.731,59.979 32.731,56.846 33.274,56.303 U5.6 R31.2 35.115,51.752 45.529,51.752 47.117,50.165
  Bottom Layer w0.254: v1(27.178,60.706) 27.178,76.327 PUART.4
IO2: Q1.3 R32.1 R47.1 U5.11 | length 33.4
  Top Layer w0.254: 50.292,52.07 50.038,52.07 49.34,52.768 40.45,52.768 R32.1 U5.11 39.624,56.303 40.167,56.846 40.167,57.105 43.81,60.748 49.38,60.748 49.445,60.683 55.014,60.683 R47.1
IO4: R48.1 U5.12 | length 20
  Top Layer w0.254: U5.12 41.217,56.076 41.217,57.583 43.978,60.344 48.876,60.344 52.832,56.388 56.134,56.388 R48.1
IO5: PGPIO.5 U5.29 | length 13.8
  Top Layer w0.254: PGPIO.5 39.624,84.455 39.624,79.883 39.45,79.709 39.45,77.373 38.677,76.6 38.677,74.872 U5.29
IO12: R49.1 U5.8 | length 27.2
  Top Layer w0.254: U5.8 35.814,56.303 36.357,56.846 36.357,57.058 49.911,70.612 R49.1
IO13: R50.1 U5.9 | length 24.5
  Top Layer w0.254: U5.9 37.084,56.303 37.627,56.846 37.627,56.868 47.942,67.183 56.134,67.183 R50.1
IO14: R45.1 U5.7 | length 25.3
  Top Layer w0.254: U5.7 34.544,56.303 35.087,56.846 35.087,57.058 v1(40.069,62.039) ; v1(52.959,62.103) 53.975,61.087 R45.1
  Bottom Layer w0.254: v1(40.069,62.039) 40.1,62.071 52.927,62.071 v1(52.959,62.103)
IO15: R46.1 U5.10 | length 21.9
  Top Layer w0.254: U5.10 38.354,56.303 38.897,56.846 38.897,56.868 46.037,64.008 56.134,64.008 R46.1
IO18: PGPIO.4 U5.30 | length 14.9
  Top Layer w0.254: PGPIO.4 39.046,82.493 39.046,79.876 39.046,77.541 37.407,75.902 37.407,74.872 U5.30
IO19: PGPIO.2 U5.32 | length 18.8
  Top Layer w0.254: PGPIO.2 35.376,81.083 36.76,81.083 38.238,79.605 38.238,77.875 37.453,77.09 36.513,77.09 35.087,75.664 35.087,75.642 34.544,75.099 U5.32
IO22: PGPIO.1 U5.33 | length 18.4
  Top Layer w0.254: PGPIO.1 27.674,86.245 28.762,86.245 31.991,83.015 32.872,83.015 36.102,79.785 36.102,78.147 33.817,75.862 33.817,75.642 33.274,75.099 U5.33
IO23: PGPIO.3 U5.31 | length 16.3
  Top Layer w0.254: PGPIO.3 38.642,80.357 38.642,77.708 37.62,76.686 37.379,76.686 36.357,75.664 36.357,75.642 35.814,75.099 U5.31
IO34: R44.2 R51.2 U5.5 | length 32.1
  Top Layer w0.254: v1(48.26,59.817) 55.118,52.959 R51.2 R44.2
  Top Layer w0.5: U5.5 v1(32.004,57.785)
  Bottom Layer w0.254: v1(32.004,57.785) 36.99,57.785 39.022,59.817 v1(48.26,59.817)
IO36: PGPIO.6 U5.4 | length 35.4
  Top Layer w0.5: U5.4 30.861,55.88 v1(30.861,57.404)
  Bottom Layer w0.254: v1(30.861,57.404) 30.861,78.922 34.738,82.8 35.683,82.8 PGPIO.6
LINEL: C18.1 PLINEIN.2 | length 5.2
  Top Layer w0.254: C18.1 47.294,78.551 47.567,78.824 47.567,79.571 PLINEIN.2
LINER: C19.1 PLINEIN.1 | length 5.8
  Top Layer w0.254: C19.1 48.818,78.551 52.067,81.8 52.336,81.8 PLINEIN.1
M1N: C25.2 C26.2 C28.1 PMIC1.2 R25.1 | length 7.1
  Top Layer w0.254: C28.1 76.646,30.926 R25.1 76.519,30.923 C25.2 78.04,32.385 C26.2
  Top Layer w0.5: C26.2 78.2,32.226 80.296,32.226 PMIC1.2
M1P: C24.2 C26.1 C27.2 PMIC1.1 R24.2 | length 7.8
  Top Layer w0.254: C26.1 78.043,33.782 C24.2 76.519,35.495 R24.2 77.916,35.56 C27.2
  Top Layer w0.5: C26.1 79.44,33.72 PMIC1.1
M2N: C31.2 C32.2 C34.1 PMIC2.2 R29.1 | length 7.2
  Top Layer w0.254: C34.1 78.167,43.561 R29.1 76.773,43.626 C31.2 76.835,45.147 C32.2
  Top Layer w0.5: C32.2 79.804,45.147 80.374,44.577 PMIC2.2
M2P: C30.2 C32.1 C33.2 PMIC2.1 R28.2 | length 7.4
  Top Layer w0.254: C32.1 78.17,46.609 C30.2 76.773,48.068 R28.2 76.962,48.387 78.043,48.387 C33.2
  Top Layer w0.5: C32.1 78.302,46.617 80.145,46.617 PMIC2.1
MBIAS: C23.2 R23.1 U5.16 | length 40
  Top Layer w0.254: C23.2 71.309,34.225 R23.1
  Top Layer w0.5: U5.16 v1(45.974,57.912) ; v1(69.85,32.893) C23.2
  Bottom Layer w0.254: v1(45.974,57.912) 45.974,57.073 56.665,46.382 56.665,46.078 v1(69.85,32.893)
MIC1N: C25.1 U5.18 | length 42.4
  Top Layer w0.5: U5.18 v1(48.514,57.912) ; v1(74.041,32.385) C25.1
  Bottom Layer w0.254: v1(48.514,57.912) 48.514,55.88 69.215,35.179 73.72,35.179 74.504,34.394 74.504,33.458 74.063,33.016 74.063,32.407 v1(74.041,32.385)
MIC1P: C24.1 U5.17 | length 40.9
  Top Layer w0.5: U5.17 v1(47.244,57.912) ; v1(73.977,33.782) C24.1
  Bottom Layer w0.254: v1(47.244,57.912) 47.244,56.388 69.85,33.782 v1(73.977,33.782)
MIC2N: C31.1 U5.14 | length 40.4
  Top Layer w0.5: U5.14 v1(43.434,57.912) ; v1(74.295,45.085) C31.1
  Bottom Layer w0.254: v1(43.434,57.912) 43.961,57.385 44.922,57.385 45.339,57.802 45.339,58.022 45.756,58.439 53.321,58.439 65.659,46.101 73.279,46.101 v1(74.295,45.085)
MIC2P: C30.1 U5.15 | length 38.3
  Top Layer w0.5: U5.15 v1(44.704,57.912) ; v1(74.295,46.609) C30.1
  Bottom Layer w0.254: v1(44.704,57.912) 44.704,57.959 45.588,58.843 53.758,58.843 66.011,46.59 74.276,46.59 v1(74.295,46.609)
NetC1_2: C1.2 U1.2 U1.3 | length 2.8
  Top Layer w0.254: C1.2@42.234,34.409 C1.2 42.102,34.671 U1.2 U1.3
NetC3_2: C3.2 R3.2 U1.5 | length 3.2
  Top Layer w0.254: R3.2 42.607,32.385 C3.2 42.722,32.45 43.394,33.122 43.993,33.122 U1.5
NetC9_1: C9.1 R14.2 U4.1 U4.8 | length 15
  Top Layer w0.254: R14.2 27.559,47.498 28.564,47.498 29.742,48.676 31.546,48.676 33.097,50.227 C9.1 33.42,50.5 35.215,50.5 U4.1 U4.8
NetC10_2: C10.2 R12.1 R13.2 U4.5 | length 14.2
  Top Layer w0.254: R12.1 33.782,48.895 v1(33.782,49.149) ; U4.5 41.058,48.477 41.708,48.477 42.876,47.309 C10.2 42.991,47.244 R13.2
  Bottom Layer w0.254: v1(33.782,49.149) 40.894,49.149 v1(42.037,48.006)
NetC11_1: C11.1 R16.2 U4.6 | length 17.2
  Top Layer w0.254: R16.2 31.877,48.26 v1(32.004,48.26) ; U4.6 42.501,49.205 42.876,48.83 C11.1 44.007,48.83 v1(44.069,48.768)
  Bottom Layer w0.254: v1(32.004,48.26) 36.772,48.26 37.553,47.479 42.78,47.479 v1(44.069,48.768)
NetC11_2: C11.2 R15.2 U4.7 | length 20.4
  Top Layer w0.254: R15.2 30.099,47.879 v1(30.099,48.006) ; U4.7 42.501,49.855 42.876,50.23 C11.2 43.877,50.23 v1(44.323,49.784)
  Bottom Layer w0.254: v1(30.099,48.006) 31.005,48.006 33.418,50.419 43.688,50.419 v1(44.323,49.784)
NetC18_2: C18.2 U5.22 | length 2.6
  Top Layer w0.254: U5.22 C18.2
NetC19_2: C19.2 U5.21 | length 2.7
  Top Layer w0.254: U5.21 48.514,76.897 C19.2
NetC20_1: C20.1 R19.1 | length 1.6
  Top Layer w0.254: C20.1 43.053,80.518 R19.1
NetC20_2: C20.2 R22.2 U5.27 | length 5.9
  Top Layer w0.254: U5.27 40.894,75.099 41.437,75.642 41.437,75.839 42.73,77.132 42.73,77.64 43.003,77.913 C20.2 43.242,77.724 R22.2
NetC21_1: C21.1 R20.2 | length 1.5
  Top Layer w0.254: R20.2 41.656,79.44 C21.1
NetC21_2: C21.2 R21.2 U5.28 | length 5
  Top Layer w0.254: U5.28 39.624,76.976 39.854,77.206 39.854,77.319 R21.2 41.594,77.724 C21.2
NetC29_1: C29.1 R23.2 R24.1 | length 4.8
  Top Layer w0.254: C29.1 72.898,34.163 R23.2 72.79,34.309 73.806,34.309 R24.1
NetC29_2: C29.2 R25.2 R26.1 | length 4.3
  Top Layer w0.254: C29.2 74.868,30.923 R26.1 75.714,30.077 75.968,30.077 R25.2
NetC35_1: C35.1 R27.2 R28.1 | length 4
  Top Layer w0.254: C35.1 73.152,47.879 R27.2 R28.1
NetC35_2: C35.2 R29.2 R30.1 | length 4.6
  Top Layer w0.254: C35.2 73.202,44.766 74.407,43.561 R30.1 76.327,42.418 76.454,42.418 R29.2
NetC36_1: C36.1 U6.4 | length 2.1
  Top Layer w0.254: C36.1 60.424,80.187 60.697,80.46 61.012,80.46 61.844,81.292 U6.4
NetC37_1: C37.1 U6.3 | length 1.8
  Top Layer w0.254: C37.1 60.424,81.457 60.697,81.73 61.782,81.73 61.844,81.792 U6.3
NetC38_1: C38.1 U6.1 | length 2.1
  Top Layer w0.254: C38.1 60.424,83.897 60.697,83.624 61.012,83.624 61.844,82.792 U6.1
NetC39_1: C39.1 U6.2 | length 1.8
  Top Layer w0.254: C39.1 60.424,82.627 60.697,82.354 61.782,82.354 61.844,82.292 U6.2
NetJ2_P1: J2.P1 R39.2 R49.2 | length 6.5
  Top Layer w0.254: R39.2 R49.2 58.039,70.358 58.039,69.734 59.889,67.884 59.889,67.054 60.072,66.871 J2.P1
NetJ2_P2: J2.P2 R38.2 R50.2 | length 4.8
  Top Layer w0.254: R38.2 R50.2 59.381,65.841 60.392,65.841 J2.P2
NetJ2_P3: J2.P3 R42.2 R46.2 | length 4.2
  Top Layer w0.254: R42.2 R46.2 58.039,64.516 60.307,64.516 J2.P3
NetJ2_P5: J2.P5 R43.2 R45.2 | length 4.1
  Top Layer w0.254: R45.2 R43.2 57.798,62.471 J2.P5
NetJ2_P7: J2.P7 R41.2 R47.2 | length 4.5
  Top Layer w0.254: R41.2 R47.2 58.039,59.563 59.364,59.563 60.072,60.271 J2.P7
NetJ2_P8: J2.P8 R40.2 R48.2 | length 5.9
  Top Layer w0.254: R40.2 R48.2 58.039,56.388 58.039,57.012 58.864,57.838 58.864,58.229 59.69,59.055 60.346,59.055 J2.P8
NetJ2_P9: J2.P9 R51.1 | length 6.4
  Top Layer w0.254: R51.1 58.039,53.213 58.039,53.837 59.889,55.687 59.889,57.888 60.072,58.071 J2.P9
NetL1_1: L1.1 U1.1 U1.19 | length 10.5
  Top Layer w0.254: L1.1@43.7,40.259 L1.1@43.827,40.132 ; L1.1 L1.1@43.827,40.132 ; U1.1 L1.1@44.018,38.668 ; U1.19 45.695,36.398 45.695,36.991 L1.1@44.018,38.668 ; L1.1@43.827,40.132 44.018,39.941 L1.1@44.018,38.668 ; L1.1@43.827,40.132 43.827,38.859 L1.1@44.018,38.668
NetL1_2: L1.2 U1.17 U1.18 | length 5
  Top Layer w0.254: U1.17 U1.18 46.228,36.627 47.74,38.139 L1.2@47.74,40.259
NetL2_2: L2.2 U3.3 U3.4 | length 5
  Top Layer w0.5: U3.3 60.331,42.691 60.331,37.756 L2.2
NetL3_2: L3.2 U4.3 | length 5
  Top Layer w0.254: U4.3 35.795,49.205 35.963,49.037 36.055,49.037 36.277,48.815 36.277,46.562 36.865,45.974 L3.2
NetQ1_2: Q1.2 R36.1 | length 1.4
  Top Layer w0.15: Q1.2 51.181,51.689 R36.1
NetQ1_6: Q1.6 R37.1 | length 1.2
  Top Layer w0.15: R37.1 48.795,50.927 Q1.6
NetR1_1: R1.1 R2.1 U1.11 | length 3.9
  Top Layer w0.254: U1.11 48.472,32.664 49.259,31.877 R2.1 R1.1
NetR5_1: R5.1 U2.9 | length 2.2
  Top Layer w0.15: U2.9 34.921,31.627 R5.1
NetR7_1: R7.1 R8.2 U3.14 | length 3.5
  Top Layer w0.254: U3.14 62.555,46.807 R7.1 R8.2
NetR9_1: R9.1 R10.1 U3.9 | length 4
  Top Layer w0.254: U3.9 65.11,42.078 R9.1
  Top Layer w0.5: R9.1 66.155,41.033 67.171,41.033 R10.1
PFO: U1.8
PGOOD: U1.12
PV+: C13.1 L3.1 PSOLAR.2 R14.1 | length 32.4
  Top Layer w0.254: R14.1 27.051,45.593 27.051,44.143 26.786,43.878 26.786,42.429 27.051,42.164 32.27,42.164 32.97,41.464 C13.1 37.122,41.464 L3.1
  Bottom Layer w0.5: v1(35.56,41.91) 33.64,39.99 33.64,36.561 34.895,35.306 35.433,35.306 37.052,33.687 37.052,29.623 PSOLAR.2
RST: PRST.1 U5.35 | length 15.5
  Top Layer w0.254: PRST.1 31.363,80.905 34.411,80.905 35.698,79.618 35.698,78.315 34.373,76.989 32.602,76.989 31.277,75.664 31.277,75.642 30.734,75.099 U5.35
RTS: U2.16
RXD0: PUART.3 U2.18 U5.37 | length 62.1
  Top Layer w0.254: U5.37 28.194,75.099 28.737,75.642 28.737,75.664 31.813,78.74 PUART.3 ; v1(34.29,36.83) 34.898,36.222 34.898,35.482 U2.18
  Top Layer w0.5: v1(28.194,72.136) U5.37
  Bottom Layer w0.254: v1(28.194,72.136) 28.194,58.801 28.533,58.462 28.533,57.018 29.59,55.961 38.891,55.961 44.85,50.002 44.85,47.39 v1(34.29,36.83)
SPKL1: PSPKL.1 U6.7 | length 2.7
  Top Layer w0.254: U6.7 64.165,77.474 PSPKL.1
SPKL2: PSPKL.2 U6.8 | length 3.5
  Top Layer w0.254: U6.8 64.665,79.971 65.909,78.727 65.909,78.27 PSPKL.2
SPKR1: PSPKR.1 U6.14 | length 4.6
  Top Layer w0.254: U6.14 64.165,84.113 64.263,84.211 64.263,84.327 66.181,86.245 66.721,86.245 PSPKR.1
SPKR2: PSPKR.2 U6.13 | length 6.4
  Top Layer w0.254: U6.13 66.958,83.942 PSPKR.2
SPOLN: C37.2 U5.26 | length 23.2
  Top Layer w0.254: U5.26 42.418,74.295 42.418,72.613 42.567,72.464 51.408,72.464 55.948,77.004 55.948,78.303 58.509,80.864 58.531,80.864 59.024,81.357 C37.2
SPOLP: C36.2 U5.25 | length 18.5
  Top Layer w0.254: U5.25 43.434,75.099 43.977,75.642 43.977,75.664 44.894,76.581 v1(45.339,76.581) ; v1(57.912,79.248) 58.478,79.814 58.751,79.814 59.024,80.087 C36.2
  Bottom Layer w0.254: v1(45.339,76.581) 45.35,76.57 54.942,76.57 55.787,77.415 55.787,77.779 57.256,79.248 v1(57.912,79.248)
SPORN: C39.2 U5.24 | length 20.6
  Top Layer w0.254: U5.24 45.027,74.226 45.027,73.654 45.813,72.868 51.24,72.868 55.544,77.172 55.544,79.169 58.509,82.134 58.531,82.134 59.024,82.627 C39.2
SPORP: C38.2 U5.23 | length 19.5
  Top Layer w0.254: U5.23 45.974,73.999 46.5,73.473 46.5,73.452 46.679,73.272 50.349,73.272 53.49,76.413 53.49,78.385 58.509,83.404 58.531,83.404 59.024,83.897 C38.2
SPSHDN: PSPK.2 R34.1 U5.34 U6.9 | length 51.4
  Top Layer w0.254: U5.34 32.004,72.771 v1(32.258,72.517) ; U6.9 R34.1@67.229,81.292 ; R34.1 R34.1@67.229,81.292 ; PSPK.2 72.898,79.248 71.755,78.105 69.596,78.105 v1(67.183,80.518) 67.183,81.246 R34.1@67.229,81.292
  Bottom Layer w0.254: v1(32.258,72.517) 61.108,72.517 65.196,76.605 65.196,78.531 v1(67.183,80.518)
SPSHDNL: PSPK.1 R33.1 U6.10 | length 6.6
  Top Layer w0.254: U6.10 66.575,81.792 66.848,82.065 68.718,82.065 R33.1 68.995,80.899 PSPK.1
TXD0: PUART.2 U2.17 U5.36 | length 65.8
  Top Layer w0.254: U5.36 29.464,75.099 30.007,75.642 30.007,75.664 31.736,77.393 33.324,77.393 PUART.2 ; U2.17 35.421,36.818 v1(35.433,36.83)
  Top Layer w0.5: v1(29.464,72.136) U5.36
  Bottom Layer w0.254: v1(29.464,72.136) 29.464,64.891 28.937,64.364 28.937,57.186 29.758,56.365 41.933,56.365 46.736,51.562 46.736,48.133 v1(35.433,36.83)
USB_N: J1.2 U2.5 U7.1 | length 4.2
  Top Layer w0.381: v1(31.369,31.877) 32.512,33.02 32.639,33.02
  Bottom Layer w0.381: J1.2 32.06,31.892 32.111,31.943 U7.1
USB_P: J1.3 U2.4 U7.3 | length 5
  Top Layer w0.381: v1(31.369,33.02) 32.008,33.659 U2.4
  Bottom Layer w0.381: J1.3 30.108,32.551 30.839,32.551 32.13,33.843 U7.3
V3V3: C7.2 C14.2 C15.2 C40.2 C41.2 C42.2 C43.1 J2.P4 PDL.1 PG0.1 PG1.1 PUART.1 PVEXT.1 R7.2 R31.1 R35.1 R38.1 R39.1 R40.1 R41.1 R42.1 R43.1 R44.1 U3.1 U3.15 U3.16 U5.2 U6.6 U6.15 | length 55.4
  Top Layer w0.254: v1(54.229,51.308) 55.626,49.911 C43.1 56.45,51.5 R44.1 ; v1(54.483,68.326) 54.991,68.834 R38.1 ; v1(54.61,65.278) 54.991,65.659 R42.1 ; v1(54.61,71.755) 54.864,72.009 R39.1 ; v1(54.737,55.118) 55.118,54.737 R40.1 ; v1(54.737,62.23) 54.991,62.484 R43.1 57.475,63.571 J2.P4 ; v1(54.864,59.69) 54.864,59.436 R41.1 ; PG0.1 60.17,86.168 C42.2 C40.2 C41.2@64.5,86.168 ; U3.1 60.555,44.028 60.588,44.061 60.588,44.503 60.78,44.695 61.222,44.695 61.255,44.728 U3.16 ; R7.2 61.255,46.822 U3.16 ; U3.15 U3.16 ; v1(62.611,79.375) 63.185,79.375 63.567,79.757 63.567,79.873 63.665,79.971 U6.6 ; U6.15 63.665,84.723 64.227,85.285 64.227,85.895 C41.2@64.5,86.168 ; C41.2 C41.2@64.5,86.168
  Top Layer w0.5: v1(26.543,49.53) 26.929,49.916 C14.2@26.929,51.374 ; U5.2 27.994,55.553 27.994,54.339 26.929,53.274 C14.2 C14.2@26.929,51.374 ; C15.2 29.018,49.453 28.868,49.603 28.7,49.603 C14.2@26.929,51.374 ; R31.1 v1(36.068,53.594) ; PVEXT.1 53.459,44.95 56.893,44.95 C7.2 59.296,44.953 59.65,44.599 59.65,44.593 60.215,44.028 U3.1 ; R35.1 61.468,28.829 v1(61.468,28.575)
VBUS: PPSEL.1 R6.1 | length 3.8
  Top Layer w0.5: PPSEL.1 28.448,38.989 R6.1
VBUSEXT: C5.2 C6.2 J1.1 R5.2 R6.2 U2.7 U2.8 U7.5 | length 27.9
  Top Layer w0.15: C6.2 34.421,30.735 U2.8
  Top Layer w0.254: v1(31.877,31.242) 31.944,31.242 32.163,31.461 33.743,31.461 34.42,30.784 C6.2 C5.2 35.814,29.083 R5.2 ; U2.7 U2.8
  Top Layer w0.5: R6.2 36.195,37.592 37.071,36.716 37.071,30.34 R5.2
  Bottom Layer w0.254: J1.1 v1(31.877,31.242) 33.039,31.242 33.677,31.88 33.677,32.29 34.28,32.893 U7.5
VCAP: C4.2 C8.2 L2.1 R1.2 R10.2 SC1.2 U1.14 U1.15 U1.16 U3.8 U3.11 | length 34
  Top Layer w0.254: U1.14 U1.15 ; U1.16 U1.15 ; R1.2 50.865,34.733 C4.2 49.341,34.671 U1.15 ; L2.1 62.738,38.929 63.205,39.396 U3.8 64.916,41.118 65.625,40.409 66.536,40.409 66.963,39.982 68.176,39.982 68.453,40.259 68.453,41.148 R10.2 66.802,42.037 66.632,42.207 66.313,42.207 C8.2 65.99,42.48 65.092,43.378 U3.11
  Top Layer w0.5: R1.2 52.705,36.449 SC1.2 58.068,36.449 58.898,35.619 61.848,35.619 62.738,36.509 L2.1
VIN: C2.2 PPSEL.2 U1.4 U1.7 U1.9 | length 31.8
  Top Layer w0.254: 43.307,33.655 U1.4 ; U1.7 45.212,30.334 45.339,30.207 C2.2 45.447,30.149 46.203,30.905 46.203,31.42 U1.9 ; C2.2@45.401,30.226 C2.2@45.474,30.299
  Top Layer w0.5: PPSEL.2 28.084,40.894 28.314,40.664 34.647,40.664 39.497,35.814 39.497,33.909 40.367,33.039 ; 43.307,33.655 40.983,33.655 40.367,33.039 ; C2.2@45.401,30.226 45.382,30.207 45.339,30.207 40.601,30.207 40.367,30.441 40.367,33.039
VSOLAR: C12.2 PPSEL.3 R12.2 R15.1 R16.1 U4.4 | length 11.4
  Top Layer w0.254: R12.2 34.567,48.283 34.567,48.477 34.645,48.555 U4.4
  Top Layer w0.5: PPSEL.3 27.813,43.705 28.499,44.39 28.499,44.882 R15.1 30.734,45.72 R16.1 32.512,46.228 R12.2 C12.2
pads on no net: J1.4 J2. U1.6 U1.20 U2.1 U2.2 U2.6 U2.10 U2.11 U2.13 U2.14 U2.19 U2.20 U3.2 U7.4 U7.6

## Polygon pours and split planes (outlines as drawn)
GND on Top Layer "TOP GND" (solid, remove dead copper, pour order 0): 25.146,91.948 25.4,91.948 83.693,91.948 83.693,25.273 83.693,23.495 24.638,23.495 24.638,91.948
V3V3 on Bottom Layer "BOT 3V3" (solid, remove dead copper, pour order 2): 24.638,91.694 24.765,91.821 83.693,91.821 83.693,23.495 24.638,23.495

## Silkscreen, mask and mechanical layers (free items; w line width, h text height)
Outline:
  the board outline again, w0.1

## Text inside footprints (layer, text, board x,y; h text height)
J1: Mechanical 13 "PCB END" at 26.124,37.292 h0.41 r270